# Altium PCB PCB1.PcbDoc
Units mil, origin at the board's own origin, x right, y up, seen from the top; angles counter-clockwise.
Board outline 3219 x 1999 mil, 2 copper layers (Top Layer, Bottom Layer); 45 components, 52 nets, 193 pads, 78 vias.
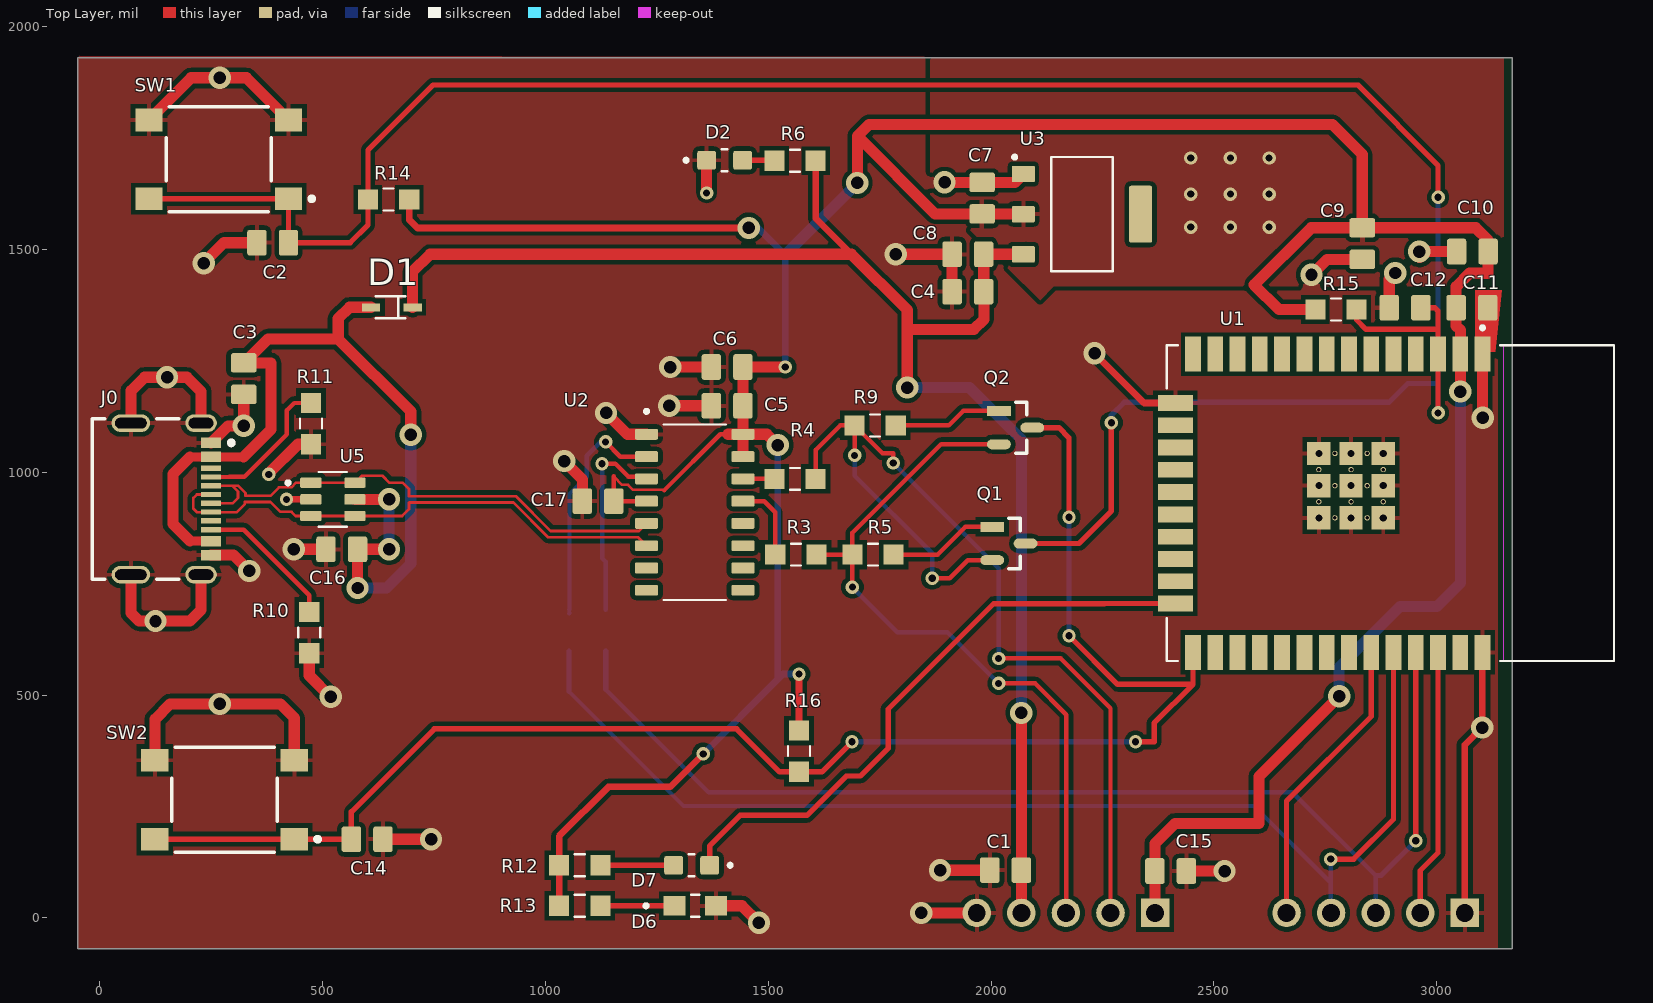
[diagram p0: Top Layer view]
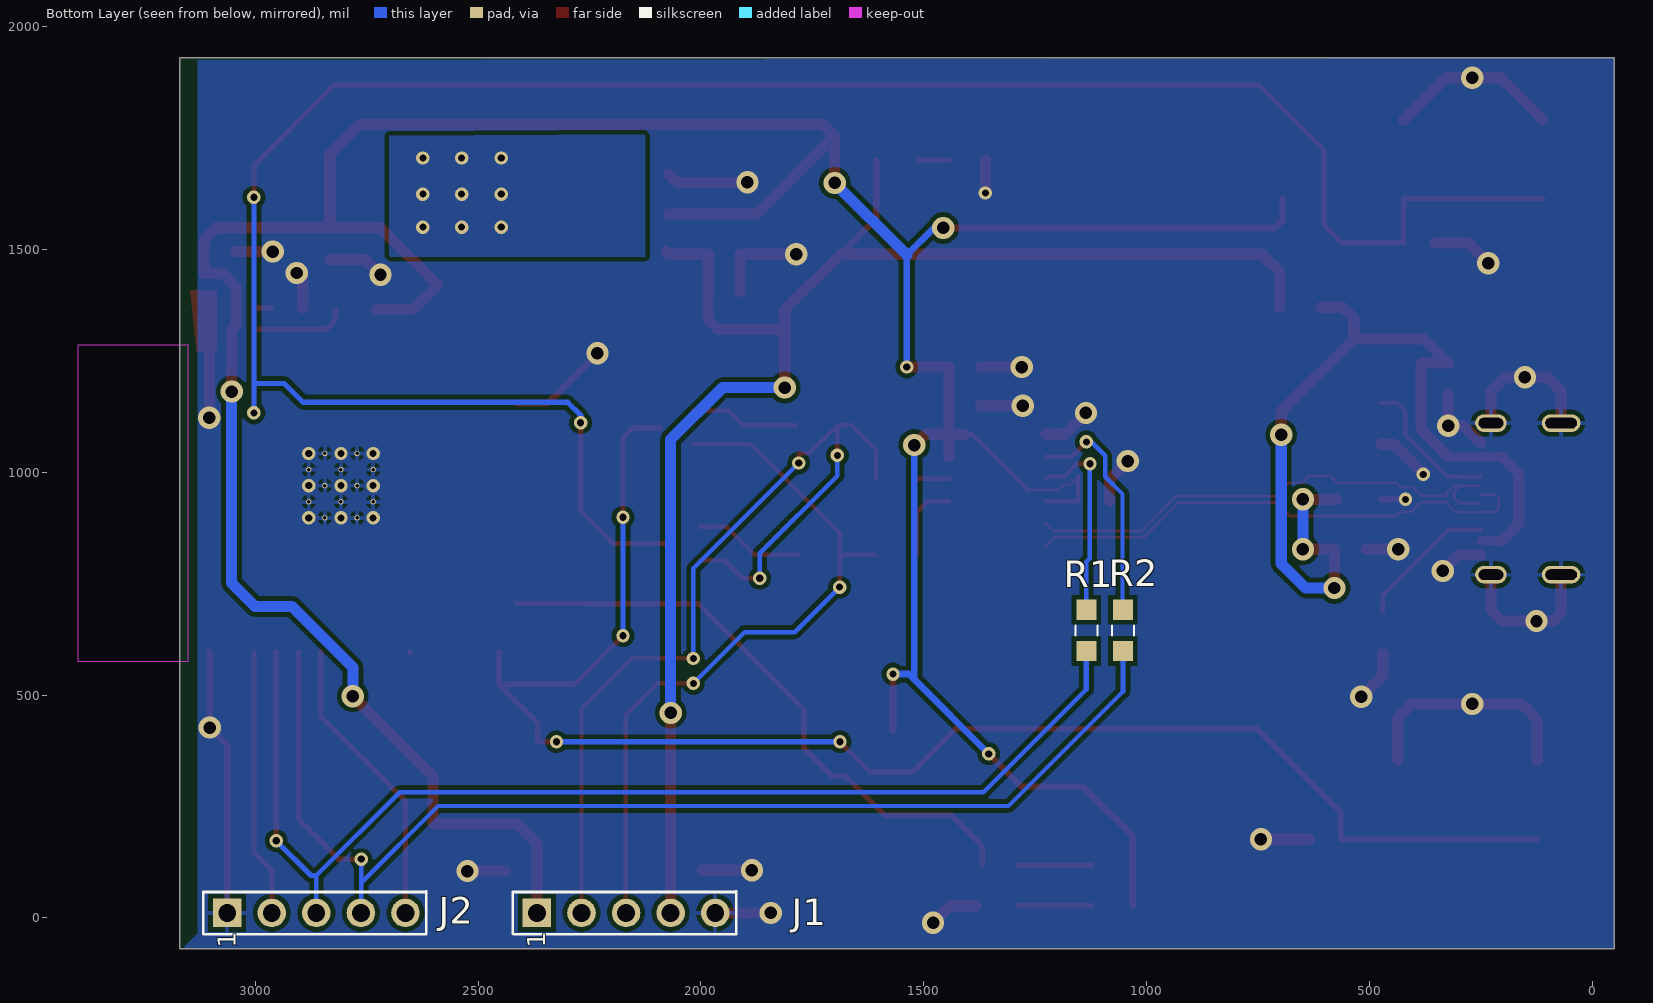
[diagram p1: Bottom Layer view, seen from below]
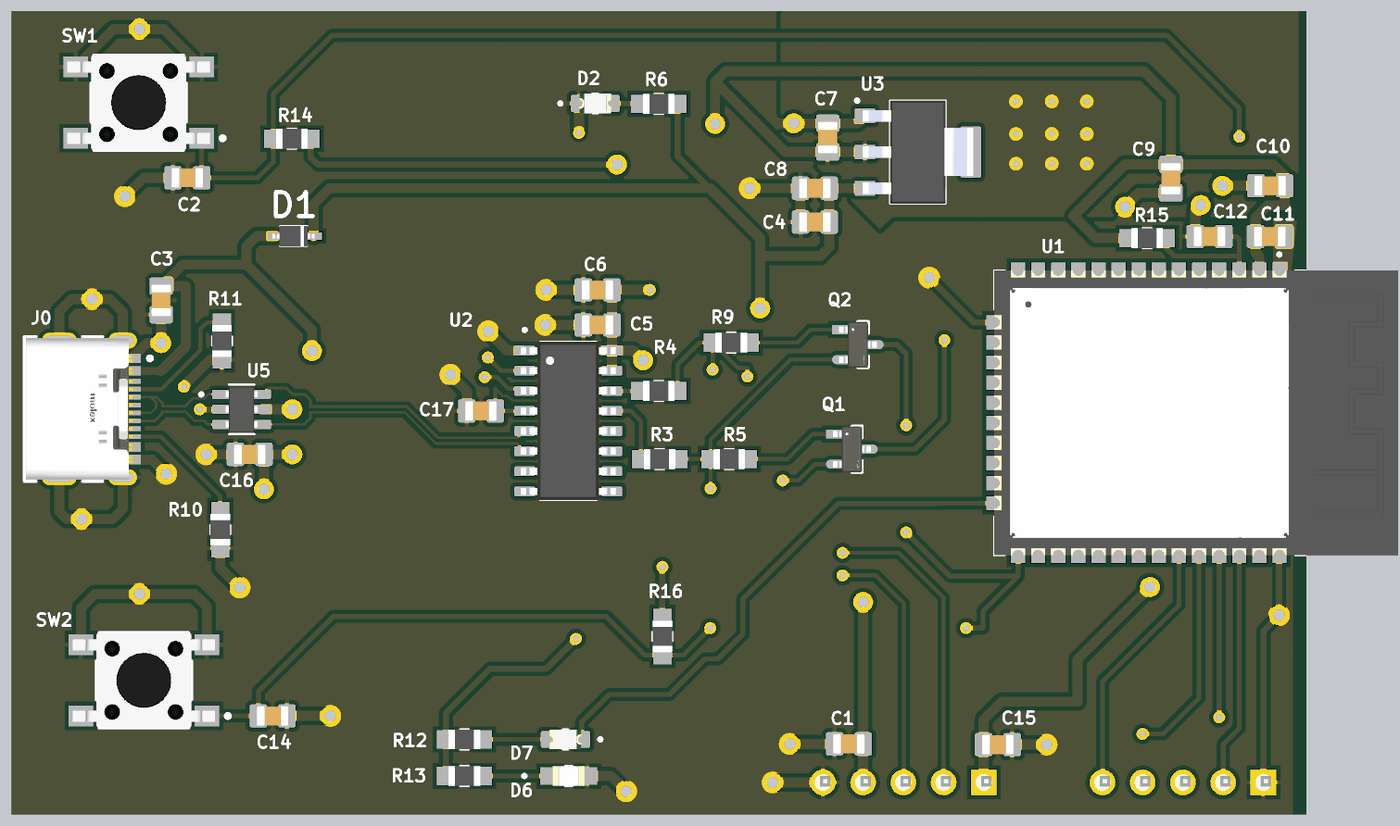
[diagram p2: 3D render of the assembled board from above, using the file's embedded part models]
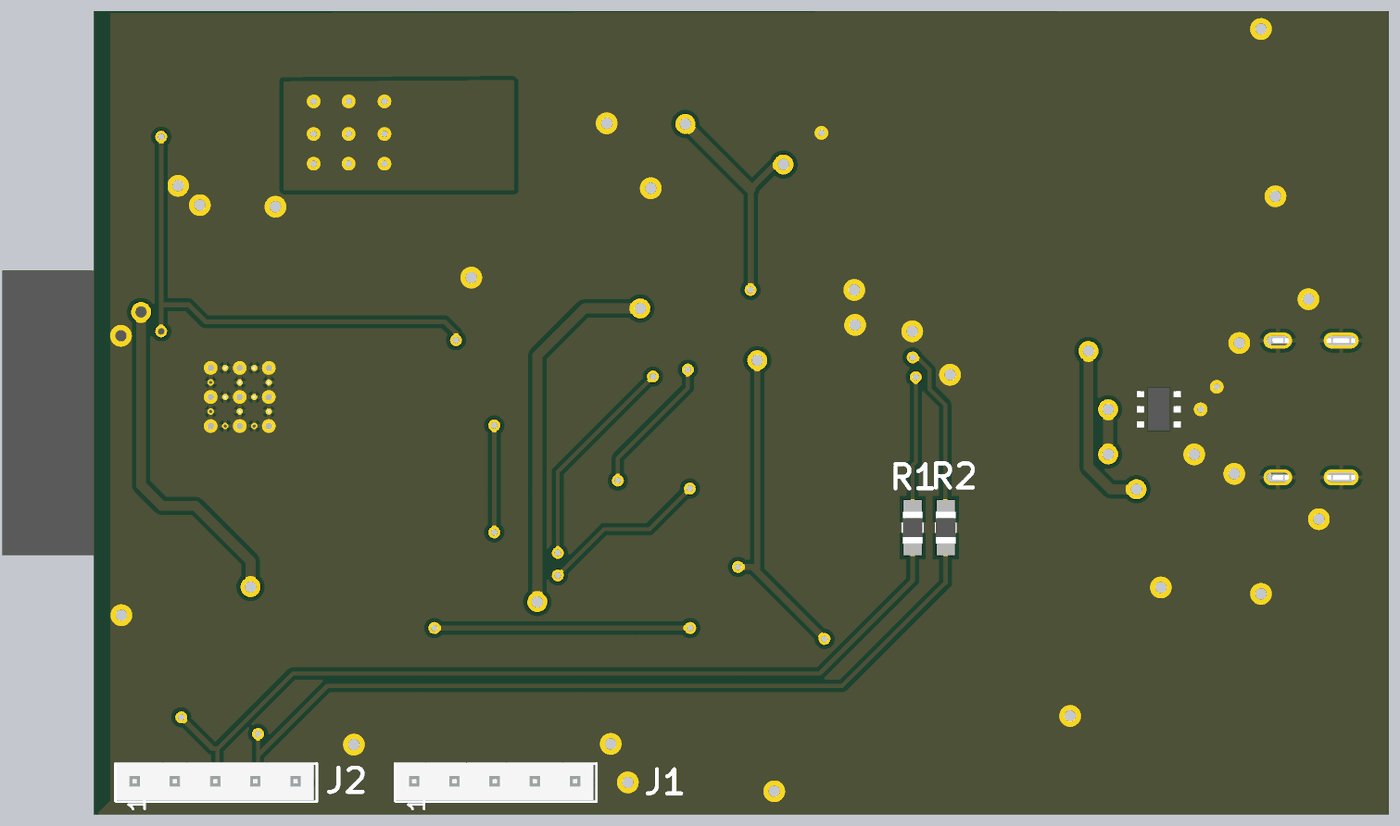
[diagram p3: 3D render of the assembled board from below, using the file's embedded part models]

## Layer stack, top to bottom
Top Solder: solder mask 0.4, Solder Resist, Dk 3.5
Top Layer: signal copper 1.4
Dielectric 1: dielectric 12.6, FR-4, Dk 4.8
Bottom Layer: signal copper 1.4
Bottom Solder: solder mask 0.4, Solder Resist, Dk 3.5

## Board outline
-49,-69 -49,1930 3170,1930 3170,-69

## Design rules (kind name [scope] priority, off if disabled: settings)
Clearance Clearance_1 [WithinRoom('USBC')] p1: gap=6 ignorepadtopadclearanceinfootprint=FALSE
Clearance [All] p2: gap=7 ignorepadtopadclearanceinfootprint=FALSE
Clearance polygon [InPolygon] p3: gap=10 ignorepadtopadclearanceinfootprint=FALSE
DiffPairsRouting DIF90 [InDifferentialPair('CON1_USB')] p1: maxlimit=8.1 minlimit=8 mostfreqgap=8 toplayer_minwidth=6.03 toplayer_maxwidth=6.23 toplayer_prefwidth=6.03 bottomlayer_minwidth=6.03 bottomlayer_maxwidth=6.23 bottomlayer_prefwidth=6.03 maxuncoupledlength=575
PolygonConnect Via_Direct_Connect [IsVia] p1: thpad.connectstyle=Relief thpad.reliefconductorwidth=10 thpad.reliefentries=4 thpad.polygonreliefangle="90 Angle" thpad.airgapwidth=10 smdpad.connectstyle=Relief smdpad.reliefconductorwidth=10 smdpad.reliefentries=4 smdpad.polygonreliefangle="90 Angle" smdpad.airgapwidth=10 via.connectstyle=Direct via.reliefconductorwidth=10 via.reliefentries=4 via.polygonreliefangle="90 Angle" via.airgapwidth=10
PolygonConnect [All] p2: connectstyle=Relief reliefconductorwidth=10 reliefentries=4 polygonreliefangle="90 Angle" airgapwidth=10
RoutingVias RoutingVias_4 [InNet('GND')] p1: holewidth=50 width=16 viastyle="Through Hole" minholewidth=10 minwidth=12 maxholewidth=52 maxwidth=52
RoutingVias RoutingVias_3 [InNet('VDD33')] p2: holewidth=30 width=16 viastyle="Through Hole" minholewidth=10 minwidth=10 maxholewidth=30 maxwidth=52
RoutingVias RoutingVias_2 [InNet('+5V')] p3: holewidth=30 width=16 viastyle="Through Hole" minholewidth=10 minwidth=10 maxholewidth=52 maxwidth=52
RoutingVias RoutingVias_1 [InNet('+5V_VBUS1')] p4: holewidth=50 width=30 viastyle="Through Hole" minholewidth=10 minwidth=10 maxholewidth=52 maxwidth=52
RoutingVias [All] p5: holewidth=16 width=30 viastyle="Through Hole" minholewidth=12 minwidth=24 maxholewidth=20 maxwidth=34
SilkToSolderMaskClearance [IsPad] p1: minsilkscreentomaskgap=8 clearancetoexposedcopper=TRUE
SolderMaskExpansion [All] p1: expansion=2 istentingtop=FALSE
Width N [InNet('CON1_USB_N')] p1: maxlimit=10 minlimit=5 preferedwidth=6 minimp=50.000000 maximp=50.000000 favimp=50.000000
Width GND [InNet('GND')] p2: maxlimit=35 minlimit=15 preferedwidth=25
Width 3V3 [InNet('VDD33')] p3: maxlimit=30 minlimit=6 preferedwidth=25 minimp=50.000000 maximp=50.000000 favimp=50.000000
Width 5V [InNet('+5V')] p4: maxlimit=30 minlimit=10 preferedwidth=25
Width 5V_VBUS1 [InNet('+5V_VBUS1')] p5: maxlimit=30 minlimit=10 preferedwidth=25
Width [All] p6: maxlimit=12 minlimit=8 preferedwidth=10
28 further rules are at their usual default settings.

## Classes and differential pairs
differential pair CON1_USB: +CON1_USB_P -CON1_USB_N

## Components (designator, comment, footprint, x,y, rotation, side; value= is the part's Value field where it differs from the comment)
C1 "100nF-25V(10%)" "CAPC2012X145N - DUPLICATE" 2032.57,107 r0 top
C2 "1uF-10V(10%)" "CAPC2012X145N - DUPLICATE" 388,1515 r0 top
C3 "100nF-25V(10%)" "CAPC2012X145N - DUPLICATE" 323,1210 r270 top
C4 "100nF-25V(10%)" "CAPC2012X145N - DUPLICATE" 1948,1405 r180 top
C5 "100nF-25V(10%)" "CAPC2012X145N - DUPLICATE" 1407.83,1149 r0 top
C6 "10uF" "CAPC2012X145N - DUPLICATE" 1407.83,1236 r0 top
C7 "22uF-25V(10%)" "CAPC2012X145N - DUPLICATE" 1980,1615 r270 top
C8 "10uF" "CAPC2012X145N - DUPLICATE" 1948,1489 r0 top
C9 "100uF-6.3V(20%)" "CAPC2012X145N - DUPLICATE" 2833,1513 r90 top
C10 "1uF-10V(10%)" "CAPC2012X145N - DUPLICATE" 3080,1495 r0 top
C11 "1uF-10V(10%)" "CAPC2012X145N - DUPLICATE" 3079,1369 r180 top
C12 "1uF-10V(10%)" "CAPC2012X145N - DUPLICATE" 2929,1369 r0 top
C14 "100nF-25V(10%)" "CAPC2012X145N - DUPLICATE" 600,176.42 r180 top
C15 "100nF-25V(10%)" "CAPC2012X145N - DUPLICATE" 2403,105 r180 top
C16 "100nF-25V(10%)" "CAPC2012X145N - DUPLICATE" 543,827 r0 top
C17 "100nF-25V(10%)" "CAPC2012X145N - DUPLICATE" 1118,935 r0 top
D1 "BAT760" SOD323(F) 652,1370 r0 top
D2 "RED_LED" LEDSC125X200X90-2N 1402,1700 r0 top
D6 "GREEN" LED_XZMG54W-1 1336,27 r0 top
D7 "RED_LED" LEDSC125X200X90-2N 1328,118 r180 top
J0 "217179-0001" FP-2171790001-MFG 115,940 r270 top
J1 "61300511121" HDR_1X5_2.54MM 2368,11 r90 bottom
J2 "61300511121" HDR_1X5_2.54MM 3063,11 r90 bottom
Q1 "SS8050-G" FP-SS8050-G-IPC_B 2040,840 r0 top locked
Q2 "SS8050-G" FP-SS8050-G-IPC_B 2055,1100 r0 top locked
R1 "0R" RES_ERA6AED512V 1135,645 r270 bottom
R2 "0R" RES_ERA6AED512V 1053,645 r270 bottom
R3 "0R" RES_ERA6AED512V 1562,815 r180 top
R4 "0R" RES_ERA6AED512V 1560,985 r180 top
R5 "10K" RES_ERA6AED512V 1735,815 r0 top locked
R6 "2K(1%)" RES_ERA6AED512V 1560,1699 r0 top
R9 "10K" RES_ERA6AED512V 1740,1105 r0 top
R10 "5.1K" RES_ERA6AED512V 470,640 r90 top
R11 "5.1K" RES_ERA6AED512V 474,1109 r90 top
R12 "1K" RES_ERA6AED512V 1077,118 r180 top
R13 "1K" RES_ERA6AED512V 1077,27 r180 top
R14 "10K" RES_ERA6AED512V 648,1612 r0 top
R15 "12K" RES_ERA6AED512V 2774,1365 r180 top
R16 "4.7K" RES_ERA6AED512V 1569,374 r90 top
SW1 "PTS645SH50SMTR92LFS" FP-PTS645SH50SMTR92LFS-MFG 267,1702 r180 top
SW2 "PTS645SH50SMTR92LFS" FP-PTS645SH50SMTR92LFS-MFG 280,265 r180 top
U1 "ESP32-WROOM-32D" MODULE_ESP32-WROOM-32D 2895.94,930.39 r270 top locked
U2 "CH340C" SOIC127P600X180-16N 1335,910 r0 top
U3 "AMS1117-3.3" SOT229P700X180-4N 2204,1579 r0 top
U5 "USBLC6-2SC6" SOT95P280X145-6N 523,939 r0 top

## Footprints (in the part's own frame and the unit in brackets; to place one, negate y for a bottom-side part, rotate by r counter-clockwise, add the part's x,y. Pads: shape width x height; smd on the part's side, far side on the other; paste and mask are expansions set on the pad)
"CAPC2012X145N - DUPLICATE" [mm]
  rrect25% 1.11x1.47 smd: 1(-0.9,0) 2(0.9,0)
  body extent -1,-0.63 1,0.63, height 1.45
FP-2171790001-MFG [mm]
  rect 0.6x1.15 smd paste+0 mask+0: A1B12(-3.2,3.425) A4B9(-2.4,3.425) B1A12(3.2,3.425) B4A9(2.4,3.425)
  rect 0.3x1.15 smd paste+0 mask+0: A5(-1.25,3.425) A6(-0.25,3.425) A7(0.25,3.425) A8(1.25,3.425) B5(1.75,3.425) B6(0.75,3.425) B7(-0.75,3.425) B8(-1.75,3.425)
  rrect100% 1x1.8 hole 1.4 slot 0.6 at 0 deg paste-2539.97 mask+0: S1(-4.32,2.85) S2(4.32,2.85)
  rrect100% 1x2.2 hole 1.8 slot 0.6 at 0 deg paste-2539.97 mask+0: S3(-4.32,-1.15) S4(4.32,-1.15)
  silkscreen extent -4.57,-3.35 4.57,4.7, body extent -4.92,-3.45 4.92,4.1, height 0.25
FP-PTS645SH50SMTR92LFS-MFG [mm]
  rect 1.55x1.3 smd paste+0 mask+0: 1(-3.975,2.25) 2(3.975,2.25) 3(-3.975,-2.25) 4(3.975,-2.25)
  silkscreen extent -5.43,-3 3,3, body extent -4.5,-3 4.5,3, height 4.3
FP-SS8050-G-IPC_B [mm]
  rect 1.357x0.572 smd paste+0 mask+0: 1(-0.951,0.95)
  rrect100% 1.357x0.572 smd paste+0 mask+0: 2(-0.951,-0.95) 3(0.951,0)
  silkscreen extent 0,-1.45 0.65,1.45, body extent -1.88,-1.7 1.88,1.7, height 0.25
HDR_1X5_2.54MM [mil]
  rect 64x64 hole 40: 1(0,0)
  round 64 hole 40: 2(0,-100) 3(0,-200) 4(0,-300) 5(0,-400)
  silkscreen extent -48,-447 48,54, body extent -44,-439 50,51, height 426
LED_XZMG54W-1 [mm]
  rect 1.25x1.1 smd: 1(-1.175,0) 2(1.175,0)
  silkscreen extent -2.9,-0.63 0.23,0.63, body extent -1,-0.63 1,0.63, height 0.75
LEDSC125X200X90-2N [mm]
  rrect25% 1.07x1.08 smd: A(1.025,0) C(-1.025,0)
  silkscreen extent -2.3,-0.63 0.17,0.63, body extent -1,-0.63 1,0.63, height 0.7
MODULE_ESP32-WROOM-32D [mm]
  rect 2x0.9 smd: 1(-8.5,5.26) 2(-8.5,3.99) 3(-8.5,2.72) 4(-8.5,1.45) 5(-8.5,0.18) 6(-8.5,-1.09) 7(-8.5,-2.36) 8(-8.5,-3.63) 9(-8.5,-4.9) 10(-8.5,-6.17) 11(-8.5,-7.44) 12(-8.5,-8.71) 13(-8.5,-9.98) 14(-8.5,-11.25) 25(8.5,-11.25) 26(8.5,-9.98) 27(8.5,-8.71) 28(8.5,-7.44) 29(8.5,-6.17) 30(8.5,-4.9) 31(8.5,-3.63) 32(8.5,-2.36) 33(8.5,-1.09) 34(8.5,0.18) 35(8.5,1.45) 36(8.5,2.72) 37(8.5,3.99) 38(8.5,5.26)
  rect 0.9x2 smd: 15(-5.715,-12.25) 16(-4.445,-12.25) 17(-3.175,-12.25) 18(-1.905,-12.25) 19(-0.635,-12.25) 20(0.635,-12.25) 21(1.905,-12.25) 22(3.175,-12.25) 23(4.445,-12.25) 24(5.715,-12.25)
  rect 1.33x1.33 smd: 39_1(-2.835,-0.405) 39_2(-1,-0.405) 39_3(0.835,-0.405) 39_4(-2.835,-2.24) 39_5(-1,-2.24) 39_6(0.835,-2.24) 39_7(-2.835,-4.075) 39_8(-1,-4.075) 39_9(0.835,-4.075)
  round 0.3 hole 0.2: 39_10(-1.917,-0.405) 39_11(-0.082,-0.405) 39_12(-2.835,-1.322) 39_13(-1,-1.322) 39_14(0.835,-1.322) 39_15(-1.917,-2.24) 39_16(-0.082,-2.24) 39_17(-2.835,-3.157) 39_18(-1,-3.157) 39_19(0.835,-3.157) 39_20(-1.917,-4.075) 39_21(-0.082,-4.075)
  Keep-Out Layer region: 9,6.45 -9,6.45 -9,12.75 9,12.75
  silkscreen extent -10.1,-12.75 9,12.75, body extent -9,-12.75 9,12.75, height 3.25
RES_ERA6AED512V [mm]
  rect 1.15x1.15 smd: 1(-1.175,0) 2(1.175,0)
  silkscreen extent -0.28,-0.63 0.28,0.63, body extent -1,-0.63 1,0.63, height 0.6
SOD323(F) [mm]
  rect 1.04x0.46 smd paste+0 mask+0.102: 1(1.27,0) 2(-1.1,0)
  silkscreen extent -0.85,-0.63 0.85,0.63, body extent -1.34,-0.65 1.34,0.65, height 1.15
SOIC127P600X180-16N [mm]
  rrect25% 1.31x0.62 smd: 1(-2.75,4.445) 2(-2.75,3.175) 3(-2.75,1.905) 4(-2.75,0.635) 5(-2.75,-0.635) 6(-2.75,-1.905) 7(-2.75,-3.175) 8(-2.75,-4.445) 9(2.75,-4.445) 10(2.75,-3.175) 11(2.75,-1.905) 12(2.75,-0.635) 13(2.75,0.635) 14(2.75,1.905) 15(2.75,3.175) 16(2.75,4.445)
  silkscreen extent -2.85,-5 1.78,5.85, body extent -3,-5 3,5, height 1.8
SOT95P280X145-6N [mm]
  rrect25% 1.21x0.59 smd: 1(-1.255,0.95) 2(-1.255,0) 3(-1.255,-0.95) 4(1.255,-0.95) 5(1.255,0) 6(1.255,0.95)
  silkscreen extent -2.65,-1.57 0.81,1.57, body extent -1.4,-1.46 1.4,1.46, height 0.4
SOT229P700X180-4N [mm]
  rrect15% 1.31x0.93 smd: 1(-3.345,2.29) 2(-3.345,0) 3(-3.345,-2.29)
  rrect15% 1.31x3.24 smd: 4(3.345,0)
  silkscreen extent -3.94,-3.25 1.75,3.35, body extent -3.5,-3.25 3.5,3.25, height 1.8

## Part data
C1 C3 C4 C5 C14 C15 C16 C17: library part VJ0805Y104KXXCW1BC, "Capacitor: ceramic; MLCC; 100nF; 25V; X7R; Â±10%; SMD; 0805", Package="0805-2 VISHAY", Check_prices=https://www.snapeda.com/parts/VJ0805Y104KXXCW1BC/Vishay/view-part/?ref=eda, MF="Vishay Vitramon", MP=VJ0805Y104KXXCW1BC, SnapEDA_Link=https://www.snapeda.com/parts/VJ0805Y104KXXCW1BC/Vishay/view-part/?ref=snap
C2 C11 C12: library part C0805C105K8RACTU, Package=None, Availability=Unavailable, MP=C0603C105K8RACTU, Price=None
C6 C8: library part CMP-03020-034663-1, "CAP CER 10UF 25V X5R 0805", Case Code (Imperial)=0805, Case Code (Metric)=2012, Dielectric=X5R, Dielectric Material=Ceramic, Max Operating Temperature=85°C, Min Operating Temperature=-55°C, Tolerance=10%, Voltage=25V, Capacitance=10uF, Case/Package=0805, Depth=1.25mm, Dissipation Factor=10%, Height=1.25mm, Lead Free="Lead Free", Length=0.079inch, Mount="Surface Mount", Packaging="Cut Tape", REACH SVHC="No SVHC", RoHS Compliant=Yes, Termination=Solder, Thickness=0.057inch, Voltage Rating=25V, Voltage Rating (DC)=25V, Width=0.049inch
C7: library part CL31X226KAHN3NE, "22 ÂµF Â±10% 25V Ceramic Capacitor X6S 1206 (3216 Metric)", Package="SMD-2 Samsung", Check_prices=https://www.snapeda.com/parts/CL31X226KAHN3NE/Samsung/view-part/?ref=eda, MF=Samsung, MP=CL31X226KAHN3NE, SnapEDA_Link=https://www.snapeda.com/parts/CL31X226KAHN3NE/Samsung/view-part/?ref=snap
C9: library part GRM21BR60J107ME15L, "100 ÂµF Â±20% 6.3V Ceramic Capacitor X5R 0805 (2012 Metric)", Package="2012 Murata", Check_prices=https://www.snapeda.com/parts/GRM21BR60J107ME15L/Murata/view-part/?ref=eda, MF=Murata, MP=GRM21BR60J107ME15L, SnapEDA_Link=https://www.snapeda.com/parts/GRM21BR60J107ME15L/Murata/view-part/?ref=snap
C10: library part C0603C105K8RACTU, Package=None, Availability=Unavailable, MP=C0603C105K8RACTU, Price=None
D1: "Diode Schottky 20 V 1A (DC) Surface Mount SOD-323", Package="SOD-323 Vishay Semiconductor Diodes Division", Check_prices=https://www.snapeda.com/parts/BAT760/Nexperia/view-part/?ref=eda, MF="Nexperia USA", MP=BAT760, SnapEDA_Link=https://www.snapeda.com/parts/BAT760/Nexperia/view-part/?ref=snap
D2 D7: library part 5990110007F, "Red 633nm LED Indication - Discrete 2.1V 0805 (2012 Metric)", Package="0805 Dialight", Availability="In Stock", Check_prices=https://www.snapeda.com/parts/599-0110-007F/Dialight/view-part/?ref=eda, MF=Dialight, MP=599-0110-007F, Price=None, Purchase-URL=https://pricing.snapeda.com/search/part/599-0110-007F/?ref=eda, SnapEDA_Link=https://www.snapeda.com/parts/599-0110-007F/Dialight/view-part/?ref=snap
D6: library part XZMG54W-1, "Green 568nm LED Indication - Discrete 2.2V 0805 (2012 Metric)", Package=None, Availability="In Stock", Check_prices=https://www.snapeda.com/parts/XZMG54W-1/SunLED/view-part/?ref=eda, MF=SunLED, MP=XZMG54W-1, Price=None, Purchase-URL=https://pricing.snapeda.com/search/part/XZMG54W-1/?ref=eda, SnapEDA_Link=https://www.snapeda.com/parts/XZMG54W-1/SunLED/view-part/?ref=snap
J0: "CONN RCP USB2.0 TYP C 24P SMD RA", LCSC Part Number=C3197684, Manufacturer=Molex, Supplier Part Number=900-2171790001CT-ND, Category=Connectors, Manufacturer Part Number=217179-0001, Pricing="1=0.9, 10=0.745, 100=0.6212 (USD)", RoHS=No, Stock=7228, Supplier=Digikey
J1 J2: "WR-PHD Straight Male, PCB Header, Through Hole, 1 Rows, 5 Contacts, 2.54mm Pitch", Color=Black, Contact Resistance=20mΩ, Current Rating=3A, Insulation Resistance=1GΩ, Manufacturer="Wurth Elektronik", Max Operating Temperature=105°C, Min Operating Temperature=-40°C, Operating Supply Voltage=250V, Supplier Part Number=732-5318-ND, Category="Headers and Wire Housings", ComponentLink1Description=https://datasheet.octopart.com:443/61300511121-W%C3%BCrth-Elektronik-datasheet-44382959.pdf?src-supplier=Future+Electronics, ComponentLink1URL=https://datasheet.octopart.com:443/61300511121-W%C3%BCrth-Elektronik-datasheet-44382959.pdf?src-supplier=Future+Electronics, ComponentLink2Description=https://datasheet.octopart.com:443/61300511121-Wurth-Elektronik-datasheet-190366221.pdf?src-supplier=Wurth+Elektronik, ComponentLink2URL=https://datasheet.octopart.com:443/61300511121-Wurth-Elektronik-datasheet-190366221.pdf?src-supplier=Wurth+Elektronik, ComponentLink3Description=https://datasheet.octopart.com:443/61300511121-W%C3%BCrth-Elektronik-datasheet-149524068.pdf?src-supplier=Farnell, ComponentLink3URL=https://datasheet.octopart.com:443/61300511121-W%C3%BCrth-Elektronik-datasheet-149524068.pdf?src-supplier=Farnell, ComponentLink4Description=https://datasheet.octopart.com:443/61300511121-W%C3%BCrth-Elektronik-datasheet-21154836.pdf?src-supplier=element14+APAC, ComponentLink4URL=https://datasheet.octopart.com:443/61300511121-W%C3%BCrth-Elektronik-datasheet-21154836.pdf?src-supplier=element14+APAC, Connector Type="Male Pin", Contact Material=Gold, Contact Mating Length=5.9944mm, Contact Plating=Gold, Gender=Male, Height=8.89mm, Lead Free="Lead Free", Lead Pitch=2.54mm, Length=12.7mm, Manufacturer Part Number=61300511121, Mounting Technology="Through Hole", Number of Contacts=5, Number of Positions=5, Number of Rows=1, Orientation=Vertical, Packaging=Bulk, Pins=5, Pitch=2.54mm, Pricing="1=0.26, 10=0.222, 25=0.1852, 50=0.155, 100=0.141, 1000=0.13485 (USD)", RoHS=Compliant, Stock=28102, Supplier=DigiKey, Termination=Solder, Voltage Rating=250V
Q1 Q2: "TRANS NPN 25V 1.5A SOT23-3", LCSC Part Number=C164886, Manufacturer=Comchip, Supplier Part Number=641-1790-1-ND, Category=Transistors, ComponentLink1Description=https://datasheet.ciiva.com:443/pdfs/VipMasterIC/IC/COMC/COMC-S-A0004994192/COMC-S-A0004994192-1.pdf?src-supplier=IHS+Markit, ComponentLink1URL=https://datasheet.ciiva.com:443/pdfs/VipMasterIC/IC/COMC/COMC-S-A0004994192/COMC-S-A0004994192-1.pdf?src-supplier=IHS+Markit, ComponentLink2Description="http://www.comchiptech.com/admin/files/product/SS8050-G RevA181526.pdf?src-supplier=Digikey", ComponentLink2URL="http://www.comchiptech.com/admin/files/product/SS8050-G RevA181526.pdf?src-supplier=Digikey", Manufacturer Part Number=SS8050-G, Pricing="1=0.29, 10=0.2, 100=0.0978, 500=0.08154, 1000=0.05666 (USD)", Reach SVHC Compliant=Yes, RoHS=Yes, RoHS Compliant=Yes, Stock=108568, Supplier=Digikey
R1 R2 R3 R4: library part CR0805AJ/-000EAS, "Resistor, AS 0805 0R Jumper 125mW, AEC-Q, Anti-Sulfur", Package="0805 Bourns", Check_prices=https://www.snapeda.com/parts/CR0805AJ/-000EAS/Bourns/view-part/?ref=eda, MF=Bourns, MP=CR0805AJ/-000EAS, SnapEDA_Link=https://www.snapeda.com/parts/CR0805AJ/-000EAS/Bourns/view-part/?ref=snap
R5 R9 R14: library part CMP-03412-049031-1, "Thin Film Chip Resistors Automotive Grade 10kΩ 0.5% 50ppm/°C 0805", Case/Package=0805, Max Operating Temperature=155°C, Max Power Dissipation=125mW, Min Operating Temperature=-55°C, Ratings=AEC-Q200, Resistance=10kR, Resistor Type="Thin Film", Temperature Coefficient=50ppm/°C, Tolerance=0.5%, Features="Moisture Resistant", Height=0.024inch, Length=0.079inch, Number of Terminations=2, Packaging="Tape and Reel", RoHS Compliant=Yes, Series=AT, Width=0.049inch
R6: library part CR0805-FX-2001ELF, "Res 0805 2k 1% 125mW", Package="0805 Bourns", Check_prices=https://www.snapeda.com/parts/CR0805-FX-2001ELF/Bourns/view-part/?ref=eda, MF=Bourns, MP=CR0805-FX-2001ELF, SnapEDA_Link=https://www.snapeda.com/parts/CR0805-FX-2001ELF/Bourns/view-part/?ref=snap
R10 R11: library part ERA6AED512V, "Res Thin Film 0805 5.1K Ohm 0.5% 0.125W(1/8W) Â±25ppm/Â°C Pad SMD Automotive T/R", Package="2012-2 Panasonic", Check_prices=https://www.snapeda.com/parts/ERA6AED512V/Panasonic/view-part/5775663/?ref=eda, Digi-Key_Part_Number=P123856CT-ND, MF=Panasonic, MP=ERA6AED512V, SnapEDA_Link=https://www.snapeda.com/parts/ERA6AED512V/Panasonic/view-part/5775663/?ref=snap
R12 R13: library part CRS0805-JX-102ELF, "1 kOhms Â±5% 0.25W, 1/4W Chip Resistor 0805 (2012 Metric) High Voltage, Pulse Withstanding Thick Film", Package="2012 Stackpole", Availability="In Stock", Check_prices=https://www.snapeda.com/parts/CRS0805-JX-102ELF/Bourns/view-part/?ref=eda, MF=Bourns, MP=CRS0805-JX-102ELF, Price=None, Purchase-URL=https://pricing.snapeda.com/search/part/CRS0805-JX-102ELF/?ref=eda, SnapEDA_Link=https://www.snapeda.com/parts/CRS0805-JX-102ELF/Bourns/view-part/?ref=snap
R15: library part ERJU06F1202V, "Res Thkflm Anti-Sulfur 0805 12k Ohm 1%, Ag Pd Based Smd", Package="2012-2 Panasonic", Check_prices=https://www.snapeda.com/parts/ERJ-U06F1202V/Panasonic/view-part/?ref=eda, MF=Panasonic, MP=ERJ-U06F1202V, SnapEDA_Link=https://www.snapeda.com/parts/ERJ-U06F1202V/Panasonic/view-part/?ref=snap
R16: library part CR0805-FX-4701ELF, "Res Thick Film 0805 4.7K Ohm 1% 0.125W(1/8W) ?100ppm/C Molded SMD T/R <a href=\"https://pricing.snapeda.com/parts/CR0805-FX-4701ELF/Bourns/view-part?ref=eda\">Check availability</a> <a href=\"https://pricing.snapeda.com/parts/CR0805-FX-4701ELF/Bourns/view-part?ref=eda\">Check availability</a>", Package=None, Availability=Unavailable, MF="{'manufacturer': u'Bourns Inc.'}", MP=CR0805-FX-4701ELF, Price=None
SW1 SW2: "SWITCH TACTILE SPST-NO 0.05A 12V", Contact Current(DC)-Max=50mA, Contact DC Max Rating R Load=0.05A@12VDC, Contact Resistance=0.1mR, Contact Voltage(DC)-Max=12V, Dielectric Withstand Volts=250VACV, Insulation Resistance=100GR, LCSC Part Number=C221869, Manufacturer="ITT C&K", Manufacturer Series=PTS645, Max Operating Temperature=60°C, Min Operating Temperature=-20°C, Supplier Part Number=CKN9085CT-ND, Actuator Type=Pushbutton, Body Breadth=5.9944inch, Body Height=3.4544mm, Body Length or Diameter=5.9944mm, Category="Tactile Switches", ComponentLink1Description=https://datasheet.ciiva.com:443/pdfs/VipMasterIC/IC/CKCI/CKCI-S-A0001796527/CKCI-S-A0001796842-1.pdf?src-supplier=IHS+Markit, ComponentLink1URL=https://datasheet.ciiva.com:443/pdfs/VipMasterIC/IC/CKCI/CKCI-S-A0001796527/CKCI-S-A0001796842-1.pdf?src-supplier=IHS+Markit, ComponentLink2Description=https://datasheet.ciiva.com/29903/getdatasheetpartid-773702-29903807.pdf?src-supplier=Verical, ComponentLink2URL=https://datasheet.ciiva.com/29903/getdatasheetpartid-773702-29903807.pdf?src-supplier=Verical, ComponentLink3Description=https://datasheet.ciiva.com/14920/pts645-14920741.pdf?src-supplier=Digikey, ComponentLink3URL=https://datasheet.ciiva.com/14920/pts645-14920741.pdf?src-supplier=Digikey, ComponentLink4Description=https://datasheet.ciiva.com/22637/1707731-22637356.pdf?src-supplier=Element14, ComponentLink4URL=https://datasheet.ciiva.com/22637/1707731-22637356.pdf?src-supplier=Element14, Electrical Life=100000Cycles, JESD-609 Code=e4, Manufacturer Part Number=PTS645SH50SMTR92LFS, Mounting Technology="Surface Mount", PCB Hole Count=4, Pricing="1=0.35, 10=0.337, 25=0.3172, 100=0.2753, 250=0.24972, 500=0.2323 (USD)", Reach SVHC Compliant=Yes, RoHS=Yes, RoHS Compliant=Yes, Stock=64637, Supplier=Digikey, Switch Action=MOMENTARY, Switch Function=SPST, Switch Type=Keypad, Terminal Finish=Silver, Terminal Length=0.138inch, Termination=Solder
U1: "Bluetooth, WiFi 802.11b/g/n, Bluetooth v4.2 +EDR, Class 1, 2 and 3 Transceiver Module 2.4GHz ~ 2.5GHz Integrated", Package="Non Standard Espressif Systems", Check_prices=https://www.snapeda.com/parts/ESP32-WROOM-32D/Espressif+Systems/view-part/?ref=eda, MF="Espressif Systems", MP=ESP32-WROOM-32D, SnapEDA_Link=https://www.snapeda.com/parts/ESP32-WROOM-32D/Espressif+Systems/view-part/?ref=snap
U2: "USB to serial chip CH340", Package=None, Availability="Not in stock", Check_prices=https://www.snapeda.com/parts/CH340C/WCH/view-part/?ref=eda, MF=WCH, MP=CH340C, Price=None, SnapEDA_Link=https://www.snapeda.com/parts/CH340C/WCH/view-part/?ref=snap
U3: "Sot223/Pkg 1-Amp 3.3-Volt Low Drop Out Voltage Regulatator", Package="SOT-223 Seeed Technology", Check_prices=https://www.snapeda.com/parts/AMS1117-3.3/Advanced+Monolithic+Systems/view-part/?ref=eda, MF="Advanced Monolithic Systems", MP=AMS1117-3.3, SnapEDA_Link=https://www.snapeda.com/parts/AMS1117-3.3/Advanced+Monolithic+Systems/view-part/?ref=snap
U5: "17V Clamp 5A (8/20Âµs) Ipp Tvs Diode Surface Mount SOT-23-6", Package="SOT-23-6 STMicroelectronics", Availability="In Stock", Check_prices=https://www.snapeda.com/parts/USBLC6-2SC6/STMicroelectronics/view-part/?ref=eda, MF=STMicroelectronics, MP=USBLC6-2SC6, Price=None, Purchase-URL=https://pricing.snapeda.com/search/part/USBLC6-2SC6/?ref=eda, SnapEDA_Link=https://www.snapeda.com/parts/USBLC6-2SC6/STMicroelectronics/view-part/?ref=snap

## Via types
v1: diameter 30, hole 16, Top Layer to Bottom Layer, 41 vias
v2: diameter 50, hole 28, Top Layer to Bottom Layer, 37 vias

## Nets (pads, with @x,y where several pads share a name; then routed paths per layer and width w, separated by ;. In a path a pad name is that pad's centre, name@x,y a point inside that pad or via, vN(x,y) a via of type N, cw(c..) or ccw(c..) an arc to the next point about the centre after c; other vN are vias at no path point)
+5V: C1.2 C4.1 C8.2 D1.1 J1.4 R6.2 U3.3 | length 3467.6
  Top Layer w15: R6.2 1606.26,1569.74 1687,1489
  Top Layer w25: D1.1 702,1449.85 741.15,1489 1687,1489 1812,1364 1812,1320 ; v2@1811,1190 v2@1811.5,1190.5 ; v2(1812,1190) 1812,1320 ; v2@2067.84,459.9 v2@2067.92,459.82 ; J1.4 C1.2 v2(2068,459.9) ; U3.3@2078.31,1494.84 2072.46,1489 C8.2 C4.1 1984,1404.43 1984,1343 1961,1320 1812,1320
  Bottom Layer w25: v2(1812,1190) 1951,1190 2068,1073 v2(2068,459.9)
+5V_VBUS1: C3.1 C16.2 D1.2 J0.A4B9 J0.B4A9 U5.5 | length 2108.8
  Top Layer w20: 202.49,845.51 J0.B4A9 ; 202.49,1034.49 J0.A4B9 322.49,1034.49
  Top Layer w25: 202.49,845.51 164,884 164,996 202.49,1034.49 ; 322.49,1034.49 384,1096 384,1244.84 383.41,1245.43 C3.1@323.59,1245.43 ; C3.1@323,1244.84 C3.1@323.3,1245.14 ; C3.1 C3.1@323.59,1245.43 ; U5.5 v2(649,939) ; v2(578.43,740.16) C16.2 v2(649,827) ; D1.2 560,1370 535,1345 535,1299 ; v2(697.85,1084.15) 697.85,1136.15 535,1299 ; C3.1@323.59,1245.43 377.16,1299 535,1299
  Bottom Layer w25: v2(578.43,740.16) 642.84,740.16 697.85,795.17 v2(697.85,1084.15) ; v2(649,827) v2(649,939)
CLK: U1.20
CMD: U1.19
CON1_USB_N: J0.A7 J0.B7 U2.5 U5.1 U5.6 | length 1174.5
  Top Layer w6.03: J0.A7 298.16,930.16 310.34,942.34 310.34,956.66 297.47,969.53 ; J0.B7 297.47,969.53 ; U2.5 1209.76,868.03 1011.8,868.03 933.81,946.02 694.01,946.02 694.01,961.98 680,976 650,976 634,992 588.01,992 U5.6 U5.1 440.4,976.4 430,966 402,966 383.01,947.02 327.01,947.02 327.01,953.51 311,969.53 297.47,969.53
CON1_USB_P: J0.A6 J0.B6 U2.6 U5.3 U5.4 | length 1173.7
  Top Layer w6.03: J0.A6 217.84,949.84 210,942 210,918 217.53,910.47 J0.B6 307.53,910.47 325.01,927.96 325.01,932.98 383.01,932.98 405,911 430,911 439.4,901.6 U5.3 U5.4 678.6,901.6 694,917 694,931.98 928,931.98 1005.99,854 1207.73,854 U2.6
DTR_FTDI: J1.3 Q2.2 R3.1 R5.1 | length 1657.9
  Top Layer w10: R3.1 R5.1 ; v1(1688.74,742) R5.1 ; v1(2017,526) 2099,526 2169,456 2169,12 J1.3 ; Q2.2 2017.05,1063.12 1888.25,1063.12 1688.74,863.62 R5.1
  Bottom Layer w10: v1(1688.74,742) 1789.74,641 1902,641 v1(2017,526)
DTR_FTDIN: R3.2 U2.13 | length 178
  Top Layer w10: U2.13 1491,935 1515.74,910.26 R3.2
EN: C2.2 C12.2 Q1.3 R14.1 R15.1 SW1.1 SW1.2 U1.3 | length 5552.3
  Top Layer w12: SW1.2 SW1.1 423.43,1613.35 C2.2 562,1515 601.74,1554.74 R14.1 601.74,1723.04 747.7,1869 2823.54,1869 3003.03,1688 v1(3003.03,1617.03) ; Q1.3 2197,840 2270,913 v1(2270,1111) ; R15.1 2820.52,1364.74 2820.52,1341.48 2841.52,1320.48 3003.03,1320.48 ; C12.2 2996.13,1369 3003.03,1362.09 3003.03,1320.48 ; v1(3003.03,1133.03) U1.3 3003.03,1320.48
  Bottom Layer w12: v1(2270,1111) 2270,1128 2299,1157 2893,1157 2935.03,1199.03 3003.03,1199.03 ; v1(3003.03,1133.03) 3003.03,1199.03 ; v1(3003.03,1617.03) 3003.03,1199.03
GND: C1.1 C2.1 C3.2 C4.2 C5.1 C6.1 C7.1 C8.1 C9.1 C10.1 C11.1 C12.1 C14.1 C15.1 C16.1 C17.1 D2.C D6.2 J0.A1B12 J0.B1A12 J0.S1 J0.S2 J0.S3 J0.S4 J1.5 J2.1 R10.1 R11.1 SW1.3 SW1.4 SW2.3 SW2.4 U1.1 U1.15 U1.38 U1.39_1 U1.39_2 U1.39_3 U1.39_4 U1.39_5 U1.39_6 U1.39_7 U1.39_8 U1.39_9 U1.39_10 U1.39_11 U1.39_12 U1.39_13 U1.39_14 U1.39_15 U1.39_16 U1.39_17 U1.39_18 U1.39_19 U1.39_20 U1.39_21 U2.1 U3.1 U5.2 | length 5146.1
  Top Layer w15: v1(419,939) U5.2 ; v2(2232.16,1266.61) 2343.39,1155.39 U1.15 ; J2.1 3063,388 v2(3102,427) 3102,594.71 U1.38
  Top Layer w25: J0.S4 69.72,684.28 88,666 v2(125,666) 202,666 227.2,691.2 J0.S2 ; J0.S3 69.72,1182.72 100,1213 v2(151,1213) 195.42,1213 227.4,1181.02 227.4,1110.27 J0.S1 ; SW1.4 204.92,1885 v2(269,1885) 329.08,1885 SW1.3 ; SW2.4 123.5,445.5 158,480 v2(269,480) 405,480 436.5,448.5 SW2.3 ; v2(233,1469) 279,1515 C2.1 ; J0.B1A12 299.98,814.02 v2(335.46,778.54) ; J0.A1B12 287.86,1104 v2(323,1104) C3.2 ; v1(379,995) 379,997 444.74,1062.74 R11.1 ; v2(435,827) C16.1 ; R10.1 470,544 v2(518,496) ; C14.1 v2(743.42,176.42) ; v2(1042,1025) 1083.16,983.84 1083.16,935.59 C17.1 ; v2(1136,1133) 1184,1085 U2.1 ; v2(1278,1149) C5.1 ; v2(1280,1236) C6.1 ; v1(1361.65,1626.65) D2.C ; D6.2 1441,27 v2(1479,-11) ; v2(1786,1489) C8.1 C4.2 ; v2(1843,11) J1.5 ; v2(1885.55,106.81) 1996.94,106.81 C1.1 ; v2(1895.57,1650.43) C7.1 2053.58,1650.43 U3.1 ; C15.1 v2(2524,105) ; v2(2719,1443) 2753.57,1477.57 C9.1 ; C12.1 2893.57,1433.57 v2(2907,1447) ; v2@2961,1483 v2@2962,1482 ; v2(2961,1495) C10.1 ; U1.1@3103,1265.06 3103,1311 3114.43,1322.43 C11.1 ; v2(3103.03,1121.97) U1.1
  other v1: 2735.51,897.51 2807.76,897.51 2880,897.51 2735.51,969.76 2807.76,969.76 2880,969.76 2735.51,1042 2807.76,1042 2880,1042
IO0: C14.2 Q2.3 R16.1 SW2.1 SW2.2 U1.25 | length 3546.3
  Top Layer w12: SW2.2 SW2.1 C14.2 564.57,237.83 750.74,424 1429,424 1525.26,327.74 R16.1 1620.74,327.74 v1(1688,395) ; Q2.3 2152,1100 2175,1077 v1(2175,899) ; v1(2175,633) 2284.03,523.97 2453.03,523.97 ; v1@2325,394 v1(2324,395) 2366,395 2366,436.94 2453.03,523.97 ; U1.25 2453.03,523.97
  Bottom Layer w12: v1(1688,395) v1(2324,395) ; v1(2175,633) v1(2175,899)
IO2: D7.C U1.24 | length 1365.6
  Top Layer w12: D7.C 1368.35,161.35 1437,230 1587,230 1675.13,318.13 1707.13,318.13 1769,380 1769,468 2006,705 2254,705 2254.39,705.39 U1.24
IO4: U1.26
IO5: U1.29 | length 1.5
  Top Layer w12: U1.29@2652,594.71 U1.29
IO12: U1.14
IO13: U1.16
IO14: U1.13
IO15: U1.23
IO16: U1.27
IO17: U1.28
IO18: U1.30
IO19: U1.31
IO21: J2.5 U1.33 | length 663.5
  Top Layer w12: J2.5 2663,67 2663,262 2853.03,452.03 U1.33
IO22: J2.2 U1.36 | length 601.3
  Top Layer w12: J2.2 2963,106 3003,146 ; 3003.03,146.03 U1.36
IO23: U1.37
IO25: U1.10
IO26: U1.11
IO27: U1.12
IO32: U1.8
IO33: U1.9
IO34: U1.6
IO35: U1.7
NetD2_A: D2.A R6.1 | length 73.2
  Top Layer w12: D2.A@1443.35,1699 D2.A 1512.74,1700 R6.1
NetD6_1: D6.1 R13.1 | length 166.5
  Top Layer w12: R13.1 D6.1
NetD7_A: D7.A R12.1 | length 164.4
  Top Layer w12: R12.1 D7.A
NetJ0_A5: J0.A5 R11.2 | length 324.6
  Top Layer w10: J0.A5 290.71,989.21 291,989.5 324.5,989.5 420,1085 420,1139 436.26,1155.26 R11.2
NetJ0_B5: J0.B5 R10.2 | length 318.8
  Top Layer w10: J0.B5 322.9,871.1 470,724 R10.2
NetQ1_1: Q1.1 R5.2 | length 247.2
  Top Layer w10: R5.2 1880,815 1942.4,877.4 Q1.1
NetQ2_1: Q2.1 R9.2 | length 244.7
  Top Layer w10: R9.2 1905,1105 1937.4,1137.4 Q2.1
RTS_FTDI: J1.2 Q1.2 R4.1 R9.1 | length 2169.5
  Top Layer w10: R4.1 1606.26,1049.88 1661.38,1105 R9.1 ; v1(1693.74,1037.74) R9.1 ; v1(1780.45,1020.55) 1780.45,1042.35 1756.37,1042.37 R9.1 ; v1(1868,762) 1907,762 1947.6,802.6 Q1.2 ; v1(2017,582) 2156.53,582 2268,470.53 J1.2
  Bottom Layer w10: v1(1693.74,1037.74) 1693.74,992.36 1868,818.1 v1(1868,762) ; v1(1780.45,1020.55) 2017,784 v1(2017,582)
RTS_FTDIN: R4.2 U2.14 | length 70.5
  Top Layer w10: U2.14 R4.2
RXD_FTDI: J2.4 R2.2 U1.34 | length 2651.1
  Top Layer w12: v1(2762.31,131.69) 2813.44,131.69 2903.03,221.29 U1.34
  Bottom Layer w10: 1053,508 1310,251 2590,251 2762.31,78.69 ; v1(2762.31,131.69) 2762.31,78.69 ; J2.4 2762.31,11.69 2762.31,78.69
  Bottom Layer w12: 1053,508 R2.2
RXD_FTDIN: R2.1 U2.2 | length 524
  Top Layer w10: v1(1135,1068) 1168,1035 U2.2
  Bottom Layer w10: R2.1@1053,683.19 R2.1@1054,684.19 ; R2.1 1054,692.26 1054,951 1093,990 1093,1037 1124,1068 v1(1135,1068)
SD0: U1.21
SD1: U1.22
SD2: U1.17
SD3: U1.18
SENSOR_VN: U1.5
SENSOR_VP: U1.4
TXD_FTDI: J2.3 R1.2 U1.35 | length 2615.9
  Top Layer w12: v1(2953.03,173.03) U1.35
  Bottom Layer w10: 1135,513 1366,282 2676,282 2863,95 J2.3
  Bottom Layer w12: 1135,513 R1.2 ; 2863,95 2875,95 v1(2953.03,173.03)
TXD_FTDIN: R1.1 U2.3 | length 444.9
  Top Layer w10: v1(1127,1019) 1157.15,1019 1185.94,990.2 1221.53,990.2 U2.3
  Bottom Layer w10: v1(1127,1019) 1127,807 1135,799 R1.1
VDD33: C5.2 C6.2 C7.2 C9.2 C10.2 C11.2 C15.2 C17.2 J1.1 R12.2 R13.2 R14.2 R15.2 R16.2 U1.2 U2.4 U2.15 U2.16 U3.2 | length 8413.7
  Top Layer w6: 1153.43,990.57 1172.28,971.72 1185.13,971.72 1196.35,960.5 1267,960.5
  Top Layer w10: 1153.43,990.57 C17.2 U2.4 ; 1267,960 1392,1085 1410,1085 ; J1.1 J1.1@2368.16,11.16
  Top Layer w15: R14.2 694.26,1566.74 713,1548 v2(1455.96,1548) ; R13.2 R12.2 1030.74,183.36 1141.38,294 1280,294 v1(1354,368) ; R16.2 1568.23,421.03 1569,421.8 v1(1569,547)
  Top Layer w25: 1410,1085 U2.16 ; U2.15 U2.16 ; v2(1521,1061) 1497,1085 U2.16 ; v1(1538,1236) C6.2 C5.2 U2.16 ; v2(1700,1649) 1700,1754 ; U3.2 2071.74,1579.57 C7.2 1979.95,1579.52 1874.48,1579.52 1700,1754 ; J1.1 2367.57,11.43 C15.2 2367.57,167.13 2412.44,212 2601,212 2601,317 v2(2781,497) ; R15.2 2646,1365 2590.5,1420.5 2718.43,1548.43 C9.2 ; v2(3053.03,1181.03) U1.2 3053.03,1318.97 3043.57,1328.43 C11.2 3043.57,1416.06 3073.94,1446.43 3115.43,1446.43 C10.2 3115.43,1520.57 3087.57,1548.43 C9.2 ; 1700,1754 1726,1780 2766,1780 2833,1713 C9.2
  Bottom Layer w15: v1(1354,368) 1521,535 ; v2(1455.96,1548) 1477,1548 1538,1487 v1(1538,1236) ; v2(1521,1061) 1521,535 ; v1(1569,547) 1533,547 1521,535
  Bottom Layer w25: 1538,1487 v2(1700,1649) ; v2(2781,497) 2781,562 2918,699 3001.03,699 3053.03,751 v2(3053.03,1181.03)
  other v1: 2448,1550 2537,1550 2624,1550 2448,1624 2537,1624 2624,1624 2448,1705 2537,1705 2624,1705
pads on no net: J0.A8 J0.B8 U1.32 U2.7 U2.8 U2.9 U2.10 U2.11 U2.12 U3.4

## Polygon pours and split planes (outlines as drawn)
GND on Top Layer "GND_L01_P002" (solid, pour order 2): -49,1934.03 -49,-69 3137,-69 3137,1917.03 3122.09,1931.94
VDD33 on Top Layer "VDD33_L01_P000" (solid, pour order 0): 1862,1931 1863,1930 1863,1556 1940,1556 2110,1386 2141,1417 3150,1417 3150,1928.99
GND on Bottom Layer "GND_L02_P003" (solid, pour order 3): -49,1930.56 -49,-69 3164,-69 3129.54,-34.54 3129.54,1924.48
VDD33 on Bottom Layer "VDD33_L02_P001" (solid, pour order 1): 2125,1758 2125,1484 2697,1484 2699,1486 2699,1755

## Other copper
Top Layer:
  region net GND: 3146.41,1408 3087,1408 3087,1273 3089.97,1270.03 3131,1270.03

## Silkscreen, mask and mechanical layers (free items; w line width, h text height)
Mechanical 1:
  the board outline again, w19.68

## Text inside footprints (layer, text, board x,y; h text height)
J1: Bottom Overlay "1" at 2349,-67 h40 r270
J2: Bottom Overlay "1" at 3044,-67 h40 r270
U1: Mechanical 13 "ANTENNA" at 3250.28,1166.61 h70 r270